# Altium PCB PCB4.pcbdoc
Units mil, origin at the board's own origin, x right, y up, seen from the top; angles counter-clockwise.
Board outline 4850 x 2100 mil, 2 copper layers (Top Layer, Bottom Layer); 24 components, 16 nets, 87 pads, 0 vias.
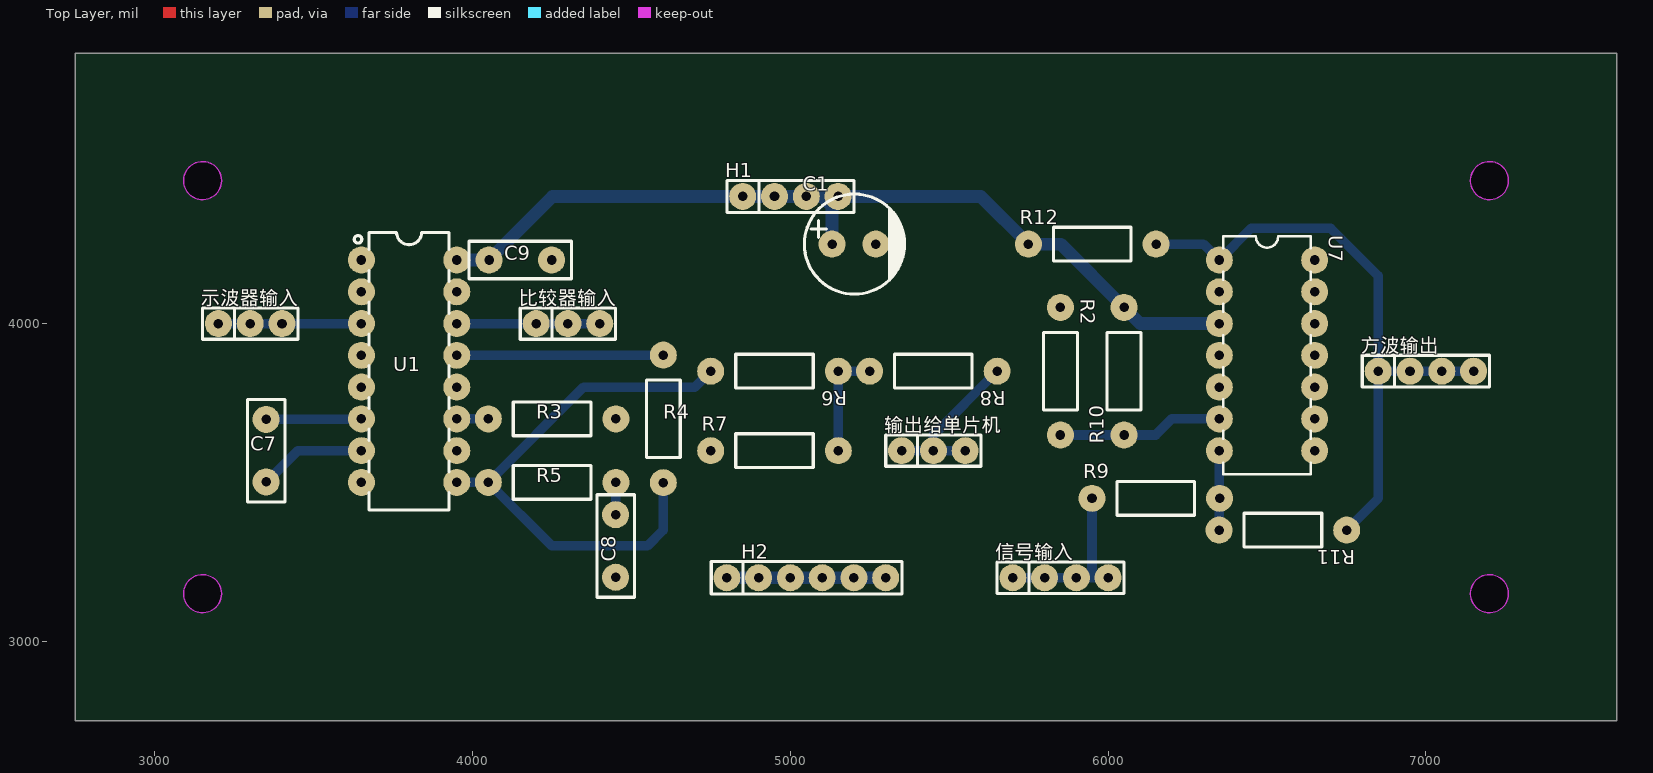
[diagram p0: Top Layer view]
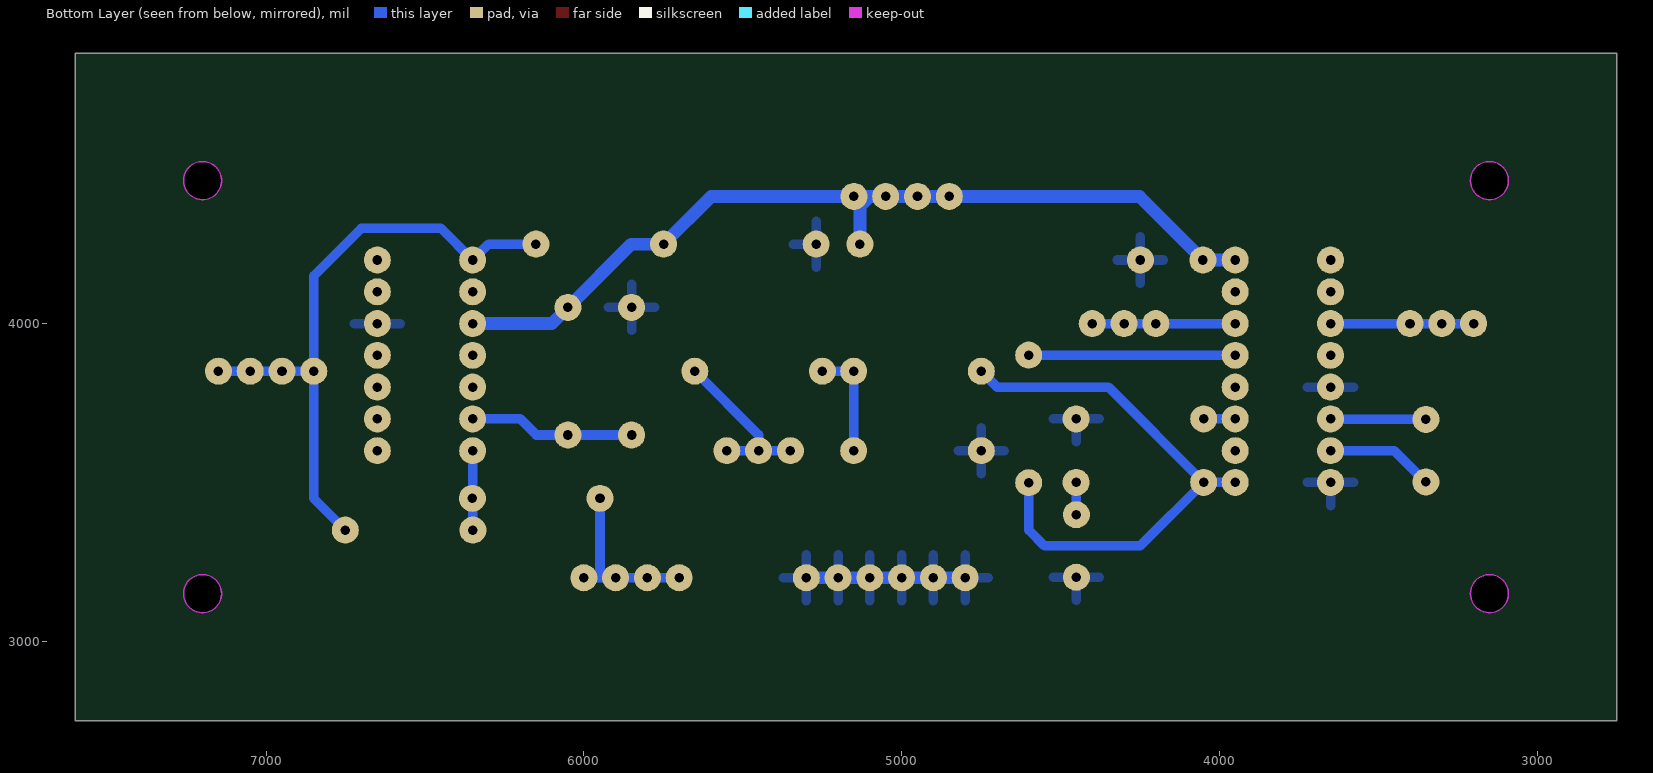
[diagram p1: Bottom Layer view, seen from below]

## Layer stack, top to bottom
Top Layer: signal copper (thickness not stored)
Dielectric: dielectric 12.6, FR-4, Dk 4.8
Bottom Layer: signal copper (thickness not stored)

## Board outline
7600,2750 2750,2750 2750,4850 7600,4850
cut-out: 7260,4450 cw(c7200,4450) 7140,4450 cw(c7200,4450)
cut-out: 7260,3150 cw(c7200,3150) 7140,3150 cw(c7200,3150)
cut-out: 3210,3150 cw(c3150,3150) 3090,3150 cw(c3150,3150)
cut-out: 3210,4450 cw(c3150,4450) 3090,4450 cw(c3150,4450)

## Design rules (kind name [scope] priority, off if disabled: settings)
BoardOutlineClearance copperThickness1oz [All] p0: genericclearance=10 ignorepadtopadclearanceinfootprint=FALSE except(0: Arc-SplitContinuation Track-SplitContinuation SMDPad-SplitContinuation THPad-SplitContinuation Via-SplitContinuation Fill-SplitContinuation Poly-SplitContinuation Region-SplitContinuation Text-SplitContinuation; 6: Track-CutoutEdge SMDPad-CutoutEdge THPad-CutoutEdge Via-CutoutEdge Region-CutoutEdge; 11.8: Track-OutlineEdge SMDPad-OutlineEdge THPad-OutlineEdge Via-OutlineEdge Fill-OutlineEdge Region-OutlineEdge Poly-OutlineEdge Text-OutlineEdge Fill-CutoutEdge)
BoardOutlineClearance copperThickness2oz [All] p0: genericclearance=10 ignorepadtopadclearanceinfootprint=FALSE except(0: Arc-SplitContinuation Track-SplitContinuation SMDPad-SplitContinuation THPad-SplitContinuation Via-SplitContinuation Fill-SplitContinuation Poly-SplitContinuation Region-SplitContinuation Text-SplitContinuation; 6: Track-CutoutEdge SMDPad-CutoutEdge THPad-CutoutEdge Via-CutoutEdge Region-CutoutEdge; 11.8: Track-OutlineEdge SMDPad-OutlineEdge THPad-OutlineEdge Via-OutlineEdge Fill-OutlineEdge Region-OutlineEdge Poly-OutlineEdge Text-OutlineEdge Fill-CutoutEdge)
Clearance copperThickness1oz [(InNet('GND') OR InNet('+5V') OR InNet('$1N637') OR InNet('$1N636') OR InNet('$1N651') OR InNet('$1N639') OR InNet('$1N648') OR InNet('$1N647') OR InNet('$1N643') OR InNet('$1N641') OR InNet('$1N929') OR InNet('$1N1045') OR InNet('$1N2926') OR InNet('IN') OR InNet('$1N2924') OR InNet('SQUARE'))] p1: gap=7 ignorepadtopadclearanceinfootprint=FALSE except(4: Track-Track; 6: Track-SMDPad SMDPad-SMDPad Track-THPad SMDPad-THPad THPad-THPad Track-Via SMDPad-Via THPad-Via Via-Via SMDPad-Fill THPad-Fill Via-Fill Fill-Fill Track-Region SMDPad-Region THPad-Region Via-Region Region-Region Track-Poly SMDPad-Poly THPad-Poly Via-Poly Fill-Poly Region-Poly Poly-Poly Track-Text SMDPad-Text THPad-Text Via-Text Fill-Text Region-Text Poly-Text Text-Text; 6.9: Track-Hole SMDPad-Hole THPad-Hole Via-Hole Fill-Hole Region-Hole Poly-Hole Text-Hole Sheet-Hole; 11.8: Track-Fill Fill-Region Track-Sheet SMDPad-Sheet THPad-Sheet Via-Sheet Fill-Sheet Region-Sheet Poly-Sheet Text-Sheet)
Clearance copperThickness2oz [All] p1: gap=7 ignorepadtopadclearanceinfootprint=FALSE except(6: Track-SMDPad SMDPad-SMDPad Track-THPad SMDPad-THPad THPad-THPad Track-Via SMDPad-Via THPad-Via Via-Via SMDPad-Fill THPad-Fill Via-Fill Fill-Fill Track-Region SMDPad-Region THPad-Region Via-Region Region-Region Track-Poly SMDPad-Poly THPad-Poly Via-Poly Fill-Poly Region-Poly Poly-Poly Track-Text SMDPad-Text THPad-Text Via-Text Fill-Text Region-Text Poly-Text Text-Text; 6.9: Track-Hole SMDPad-Hole THPad-Hole Via-Hole Fill-Hole Region-Hole Poly-Hole Text-Hole Sheet-Hole; 8: Track-Track; 11.8: Track-Fill Fill-Region Track-Sheet SMDPad-Sheet THPad-Sheet Via-Sheet Fill-Sheet Region-Sheet Poly-Sheet Text-Sheet)
DiffPairsRouting differentialPair [All] p1: maxuncoupledlength=10 minlimit=6 maxlimit=6 mostfreqgap=6 toplayer_minwidth=5 toplayer_prefwidth=10 toplayer_maxwidth=100 bottomlayer_minwidth=5 bottomlayer_prefwidth=10 bottomlayer_maxwidth=100
PasteMaskExpansion pasteMaskExpansion [All] p1: expansion=0
PlaneConnect innerPlane [All] p1: planeconnectstyle=Relief reliefexpansion=20 reliefentries=4 reliefconductorwidth=10 reliefairgap=10
PolygonConnect copperRegion [All] p1: connectstyle=Relief reliefentries=4 reliefconductorwidth=10 polygonreliefangle="90 Angle" airgapwidth=10
PolygonConnect copperRegion1 [All] p1: connectstyle=Relief reliefentries=4 reliefconductorwidth=30 polygonreliefangle="90 Angle" airgapwidth=30
RoutingVias viaSize [All] p1: viastyle="Through Hole" holewidth=12.0078 minholewidth=11.811 maxholewidth=248.0314 width=24.0158 minwidth=19.685 maxwidth=393.7008
SolderMaskExpansion solderMaskExpansion [All] p1: useseparateexpansions=TRUE expansion=2 expansionbottom=2
Width copperThickness1oz [All] p1: maxlimit=100 minlimit=5 preferedwidth=10
Width copperThickness2oz [All] p1: maxlimit=100 minlimit=8 preferedwidth=10

## Components (designator, comment, footprint, x,y, rotation, side; value= is the part's Value field where it differs from the comment)
C1 "ERS1HM4R7D11OT" CAP-TH_BD8.0-P3.50-D0.8-FD 5200,4250 r0 top
C7 "R08B1B102KN0B0S0N0" CAP-TH_L8.0-W3.0-P5.0-D0.60 3350,3600 r270 top
C8 "R08B1B102KN0B0S0N0" CAP-TH_L8.0-W3.0-P5.0-D0.60 4450,3300 r90 top
C9 "R08B1B102KN0B0S0N0" CAP-TH_L8.0-W3.0-P5.0-D0.60 4150,4200 r0 top
H1 "PZ254V-11-04P" HDR-TH_4P-P2.54-V-M 5000,4400 r0 top
H2 "PZ254V-11-06P" HDR-TH_6P-P2.54-V-M 5050,3200 r0 top
R2 "MF1/4W-10K±1%-ST52" RES-TH_BD2.7-L6.2-P10.20-D0.4 5850,3850 r270 top
R3 "MF1/4W-1K±1%-ST52" RES-TH_BD2.7-L6.2-P10.20-D0.4 4250,3700 r0 top
R4 "MF1/4W-1K±1%-ST52" RES-TH_BD2.7-L6.2-P10.20-D0.4 4600,3700 r90 top
R5 "MF1/4W-1K±1%-ST52" RES-TH_BD2.7-L6.2-P10.20-D0.4 4250,3500 r180 top
R6 "MF1/4W-1K±1%-ST52" RES-TH_BD2.7-L6.2-P10.20-D0.4 4950,3850 r180 top
R7 "MF1/4W-1K±1%-ST52" RES-TH_BD2.7-L6.2-P10.20-D0.4 4950,3600 r0 top
R8 "MF1/4W-1K±1%-ST52" RES-TH_BD2.7-L6.2-P10.20-D0.4 5450,3850 r180 top
R9 "MF1/4W-10K±1%-ST52" RES-TH_BD2.7-L6.2-P10.20-D0.4 6150,3450 r0 top
R10 "MF1/4W-10K±1%-ST52" RES-TH_BD2.7-L6.2-P10.20-D0.4 6050,3850 r90 top
R11 "MF1/4W-10K±1%-ST52" RES-TH_BD2.7-L6.2-P10.20-D0.4 6550,3350 r180 top
R12 "MF1/4W-10K±1%-ST52" RES-TH_BD2.7-L6.2-P10.20-D0.4 5950,4250 r0 top
U1 "CD74HC4046AE" PDIP-16_L22.1-W6.3-P2.54-LS7.6-BL 3800,3850 r270 top
U7 "LM339N" DIP-14_L19.0-W7.0-P2.54-LS7.6-BL 6500,3900 r270 top
信号输入 "PZ254V-11-04P" HDR-TH_4P-P2.54-V-M 5850,3200 r0 top
方波输出 "PZ254V-11-04P" HDR-TH_4P-P2.54-V-M 7000,3850 r0 top
比较器输入 "PZ254V-11-03P" HDR-TH_3P-P2.54-V-M 4300,4000 r0 top
示波器输入 "PZ254V-11-03P" HDR-TH_3P-P2.54-V-M 3300,4000 r0 top
输出给单片机 "PZ254V-11-03P" HDR-TH_3P-P2.54-V-M 5450,3600 r0 top

## Footprints (in the part's own frame and the unit in brackets; to place one, negate y for a bottom-side part, rotate by r counter-clockwise, add the part's x,y. Pads: shape width x height; smd on the part's side, far side on the other; paste and mask are expansions set on the pad)
CAP-TH_BD8.0-P3.50-D0.8-FD [mil]
  round 85 hole 30: 1(-68.9,0) 2(68.9,0)
  silkscreen extent -156,-157 159,157
CAP-TH_L8.0-W3.0-P5.0-D0.60 [mil]
  round 85 hole 30: 1(-98.43,0) 2(98.43,0)
  silkscreen extent -161,-59 161,59
DIP-14_L19.0-W7.0-P2.54-LS7.6-BL [mil]
  round 85 hole 30: 1(-300,-150) 2(-200,-150) 3(-100,-150) 4(0,-150) 5(100,-150) 6(200,-150) 7(300,-150) 8(300,150) 9(200,150) 10(100,150) 11(0,150) 12(-100,150) 13(-200,150) 14(-300,150)
  silkscreen extent -374,-138 374,138
HDR-TH_3P-P2.54-V-M [mil]
  round 85 hole 30: 1(-100,0) 2(0,0) 3(100,0)
  silkscreen extent -150,-49 150,49
HDR-TH_4P-P2.54-V-M [mil]
  round 85 hole 30: 1(-150,0) 2(-50,0) 3(50,0) 4(150,0)
  silkscreen extent -200,-50 200,50
HDR-TH_6P-P2.54-V-M [mil]
  round 85 hole 30: 1(-250,0) 2(-150,0) 3(-50,0) 4(50,0) 5(150,0) 6(250,0)
  silkscreen extent -299,-51 301,51
PDIP-16_L22.1-W6.3-P2.54-LS7.6-BL [mil]
  round 85 hole 30: 1(-350,-150) 2(-250,-150) 3(-150,-150) 4(-50,-150) 5(50,-150) 6(150,-150) 7(250,-150) 8(350,-150) 9(350,150) 10(250,150) 11(150,150) 12(50,150) 13(-50,150) 14(-150,150) 15(-250,150) 16(-350,150)
  silkscreen extent -437,-172 437,126
RES-TH_BD2.7-L6.2-P10.20-D0.4 [mil]
  round 85 hole 30 copper offset -0.01,0: 1(-200.78,0)
  round 85 hole 30 copper offset 0.01,0: 2(200.78,0)
  silkscreen extent -122,-53 122,53

## Nets (pads, with @x,y where several pads share a name; then routed paths per layer and width w, separated by ;. In a path a pad name is that pad's centre, name@x,y a point inside that pad or via, vN(x,y) a via of type N, cw(c..) or ccw(c..) an arc to the next point about the centre after c; other vN are vias at no path point)
$1N636: C7.1 U1.6 | length 300.7
  Bottom Layer w30: C7.1 3648.43,3698.43 U1.6
$1N637: C7.2 U1.7 | length 340.8
  Bottom Layer w30: C7.2 3351.58,3501.58 3450,3600 U1.7
$1N639: R3.1 U1.11 | length 99.2
  Bottom Layer w30: U1.11 R3.1
$1N641: U1.14 比较器输入.1 比较器输入.2 比较器输入.3 | length 450
  Bottom Layer w30: U1.14 比较器输入.1 比较器输入.2 比较器输入.3
$1N643: U1.3 示波器输入.1 示波器输入.2 示波器输入.3 | length 450
  Bottom Layer w30: 示波器输入.1 示波器输入.2 示波器输入.3 U1.3
$1N647: R4.2 U1.13 | length 650.3
  Bottom Layer w30: U1.13 4599.21,3900 R4.2
$1N648: R4.1 R5.2 R6.2 U1.9 | length 1747.7
  Bottom Layer w30: U1.9 R5.2 ; R4.1 4600,3350 4550,3300 4249.21,3300 R5.2 ; R6.2 4699.21,3800 4349.21,3800 R5.2
$1N651: C8.2 R5.1 | length 101.9
  Bottom Layer w30: C8.2 4450.79,3399.21 R5.1
$1N929: R6.1 R7.2 R8.2 | length 348.4
  Bottom Layer w30: R7.2 R6.1 R8.2
$1N1045: R8.1 输出给单片机.1 输出给单片机.2 输出给单片机.3 | length 533.2
  Bottom Layer w30: 输出给单片机.1 输出给单片机.2 ; 输出给单片机.3 输出给单片机.2 ; R8.1 5450,3649.21 输出给单片机.2
$1N2924: R9.2 R11.2 U7.7 | length 250.3
  Bottom Layer w30: R11.2 6350,3350.79 U7.7
$1N2926: R2.2 R10.1 U7.6 | length 521
  Bottom Layer w30: R2.2 R10.1 6149.21,3649.21 6200,3700 U7.6
+5V: C1.1 C9.1 H1.1 H1.2 H1.3 H1.4 R10.2 R12.1 U1.16 U7.3 | length 2811.4
  Bottom Layer w40: U1.16 C9.1 4251.58,4400 H1.1 H1.2 H1.3 5100,4400 ; C1.1 5131.1,4368.9 5100,4400 ; U7.3 6100.79,4000 R10.2 5850.79,4250 R12.1 5599.21,4400 H1.4 5100,4400
GND: C1.2 C8.1 C9.2 H2.1 H2.2 H2.3 H2.4 H2.5 H2.6 R2.1 R3.2 R7.1 U1.5 U1.8 U7.12 | length 500
  Bottom Layer w40: H2.1 H2.2 H2.3 H2.4 H2.5 H2.6
IN: R9.1 信号输入.1 信号输入.2 信号输入.3 信号输入.4 | length 552
  Bottom Layer w30: 信号输入.1 信号输入.2 信号输入.3 5944.47,3200 ; R9.1 5949.21,3204.74 5944.47,3200 ; 信号输入.4 5944.47,3200
SQUARE: R11.1 R12.2 U7.1 方波输出.1 方波输出.2 方波输出.3 方波输出.4 | length 1964.6
  Bottom Layer w30: R12.2 6300,4250 U7.1 6450,4300 6700,4300 6850,4150 方波输出.1 ; R11.1 6750.79,3350.79 6850,3450 方波输出.1 ; 方波输出.4 方波输出.3 方波输出.2 方波输出.1
pads on no net: U1.1 U1.2 U1.4 U1.10 U1.12 U1.15 U7.2 U7.4 U7.5 U7.8 U7.9 U7.10 U7.11 U7.13 U7.14

## Polygon pours and split planes (outlines as drawn)
GND on Bottom Layer (solid, remove dead copper, pour order 0): 3000,4600 7350,4600 7350,3000 3000,3000

## Keep-outs
Board Outline Layer:
  circle w1: c7200,4450 r60
  region: 7260,4450 cw(c7200,4450) 7140,4450 cw(c7200,4450)
  circle w1: c7200,3150 r60
  region: 7260,3150 cw(c7200,3150) 7140,3150 cw(c7200,3150)
  circle w1: c3150,3150 r60
  region: 3210,3150 cw(c3150,3150) 3090,3150 cw(c3150,3150)
  circle w1: c3150,4450 r60
  region: 3210,4450 cw(c3150,4450) 3090,4450 cw(c3150,4450)

## Silkscreen, mask and mechanical layers (free items; w line width, h text height)
Mechanical Layer:
  circle w1: c7200,4450 r60
  circle w1: c7200,3150 r60
  circle w1: c3150,3150 r60
  circle w1: c3150,4450 r60